# Altium PCB PCB1.PcbDoc
Units mil, origin at the board's own origin, x right, y up, seen from the top; angles counter-clockwise.
Board outline 4600 x 3500 mil, 2 copper layers (Top Layer, Bottom Layer); 17 components, 35 nets, 104 pads, 47 vias.
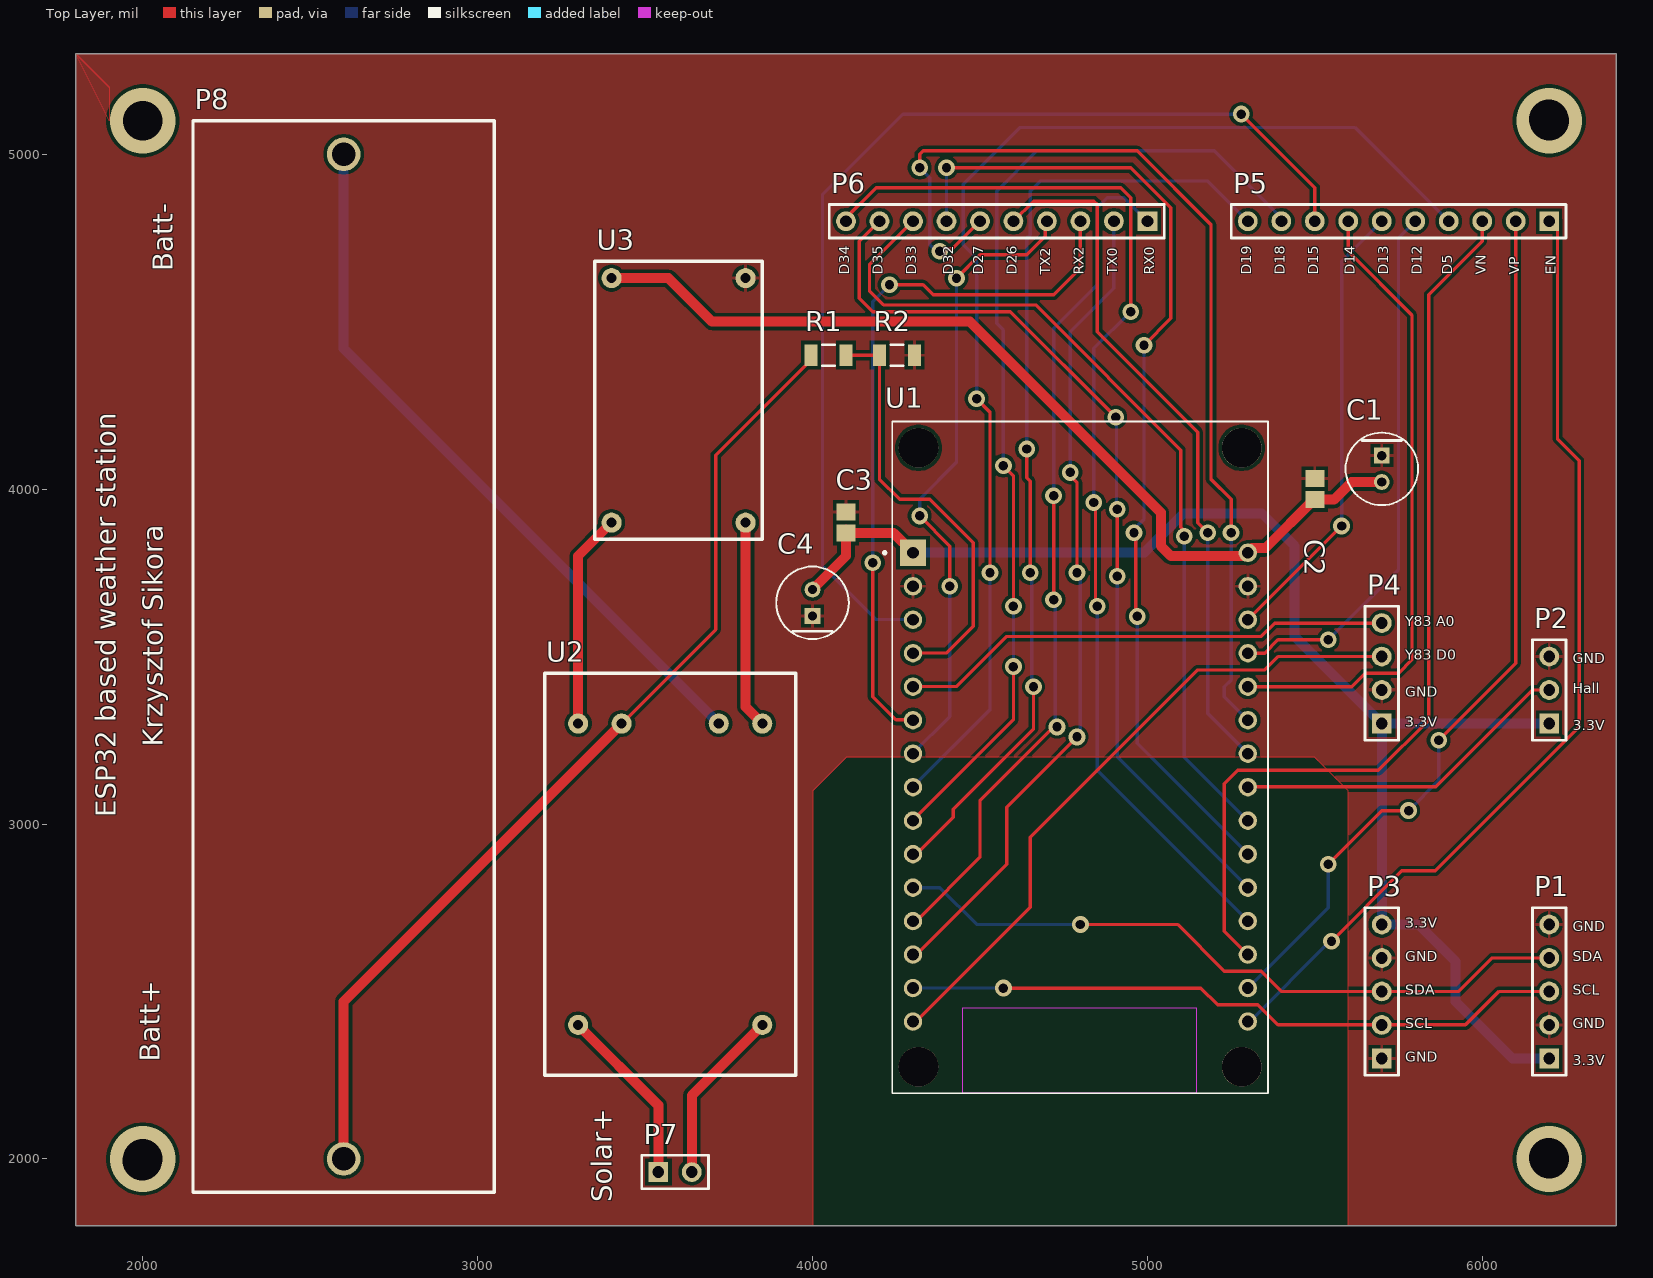
[diagram p0: Top Layer view]
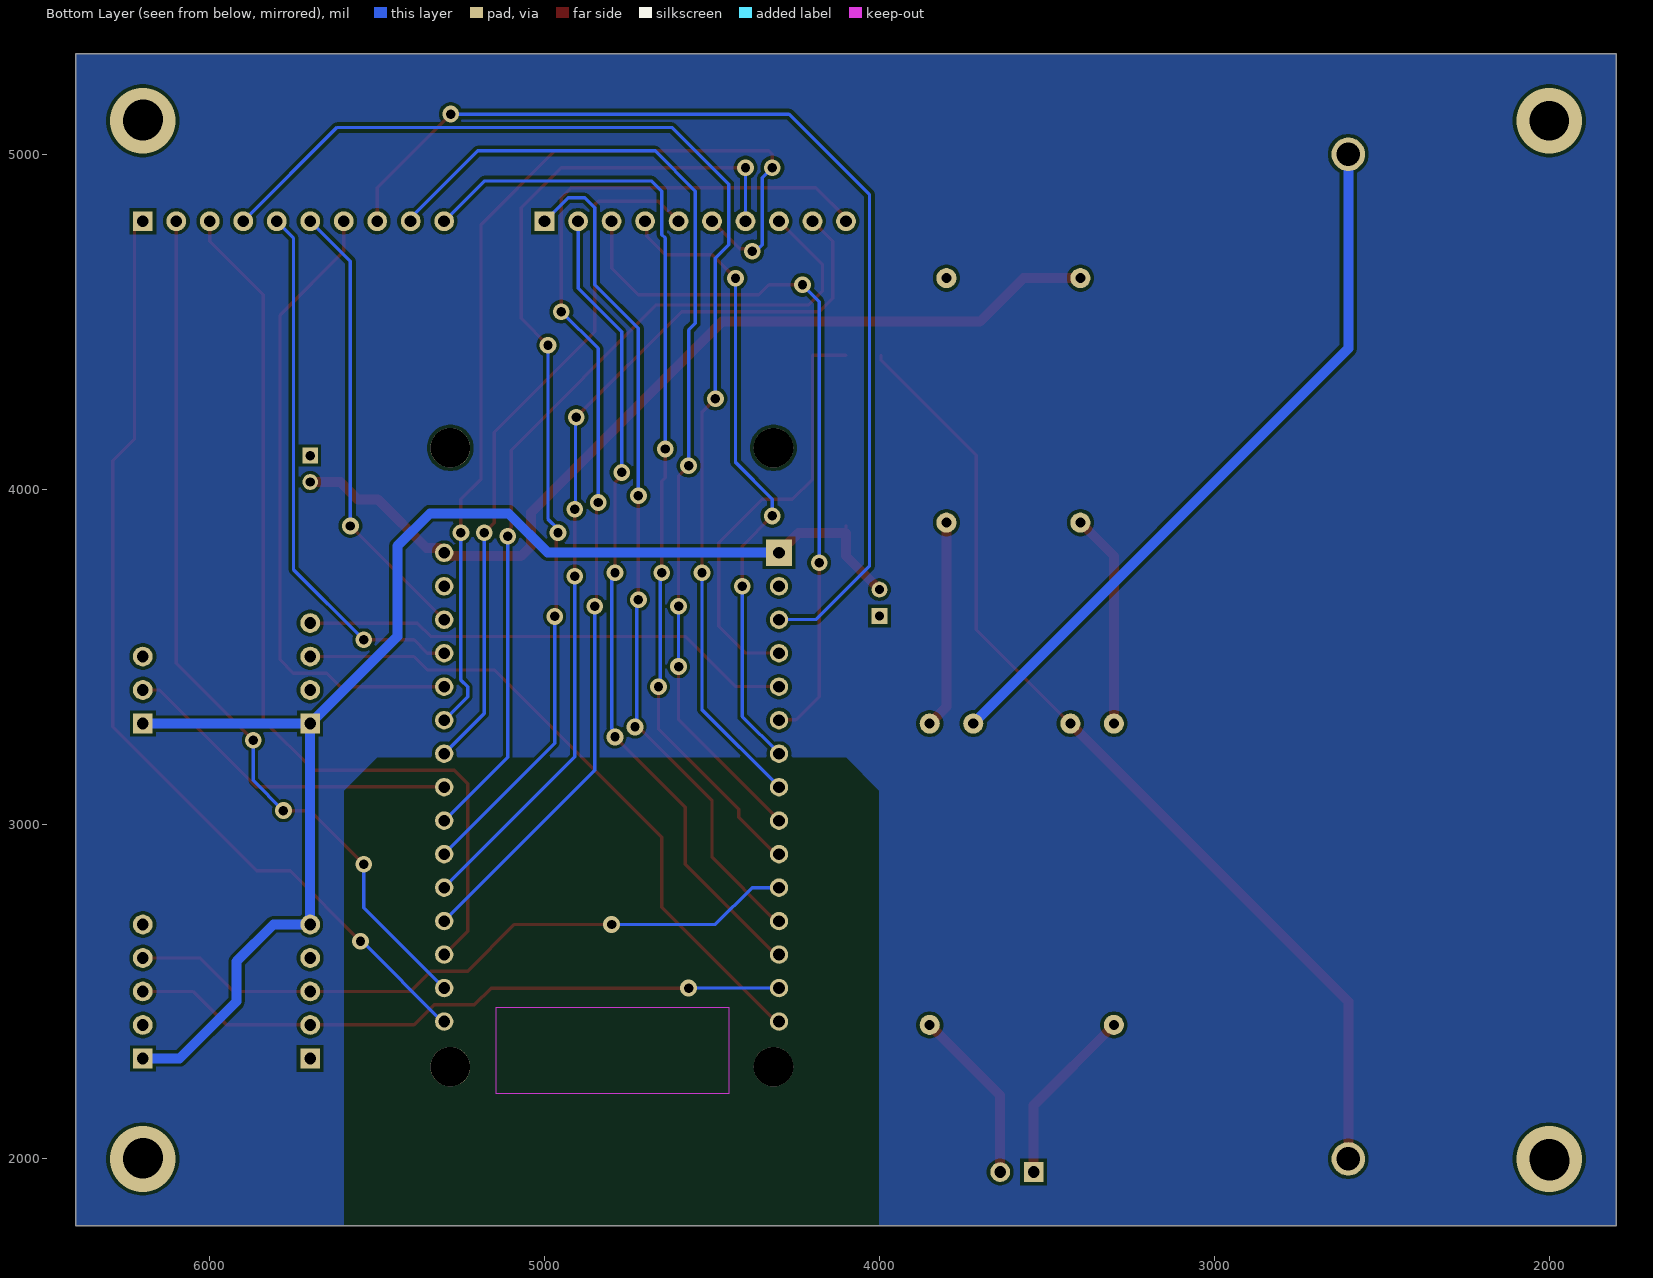
[diagram p1: Bottom Layer view, seen from below]

## Layer stack, top to bottom
Top Solder: solder mask 0.4, Solder Resist, Dk 3.5
Top Layer: signal copper 1.4
Dielectric 1: dielectric 12.6, FR-4, Dk 4.8
Bottom Layer: signal copper 1.4
Bottom Solder: solder mask 0.4, Solder Resist, Dk 3.5

## Board outline
1800,5300 6400,5300 6400,1800 1800,1800

## Design rules (kind name [scope] priority, off if disabled: settings)
Clearance [All] p1: gap=10 ignorepadtopadclearanceinfootprint=FALSE except(0: Arc-Hole Track-Hole SMDPad-Hole THPad-Hole Via-Hole Fill-Hole Poly-Hole Region-Hole Text-Hole)
PolygonConnect [All] p1: connectstyle=Relief reliefconductorwidth=10 reliefentries=4 polygonreliefangle="90 Angle" airgapwidth=10
RoutingVias [All] p1: holewidth=28 width=50 viastyle="Through Hole" minholewidth=28 minwidth=50 maxholewidth=28 maxwidth=50
SolderMaskExpansion [All] p1: expansion=4 istentingtop=FALSE
Width [All] p1: maxlimit=50 minlimit=5 preferedwidth=10 minimp=50.000000 maximp=50.000000 favimp=50.000000
30 further rules are at their usual default settings.

## Components (designator, comment, footprint, x,y, rotation, side; value= is the part's Value field where it differs from the comment)
C1 "10u" FP-RAD-TH-D_5_0_5-L_11_1-MFG 5700,4060.63 r270 top
C2 "100n" CAPC2013X140X50NL20T25 5500,4000 r270 top
C3 "100n" CAPC2013X140X50NL20T25 4100,3900 r270 top
C4 "10u" FP-RAD-TH-D_5_0_5-L_11_1-MFG 4000,3660.63 r90 top
P1 "Header 5" HDR1X5 6200,2300 r90 top
P2 "Header 3" HDR1X3 6200,3300 r90 top
P3 "Header 5" HDR1X5 5700,2300 r90 top
P4 "Header 4" HDR1X4 5700,3300 r90 top
P5 "Header 10" HDR1X10 6200,4800 r180 top
P6 "Header 10" HDR1X10 5000,4800 r180 top
P7 "Header 2" HDR1X2 3539.53,1960.47 r0 top
P8 "Header 2" "18650 holder" 3950,7150 r90 top
R1 "3.3k" FP-CRCW1206-e3-IPC_C 4047.79,4400 r180 top
R2 "10k" FP-CRCW1206-e3-IPC_C 4252.21,4400 r180 top
U1 "ESP32-DEVKIT-V1" MODULE_ESP32_DEVKIT_V1 4800,3199.17 r0 top
U2 "TP4056 charger" "TP4056 module" 3700,3000 r270 top
U3 "DC/DC converter" "DC/DC converter module" 3600,4200 r90 top

## Footprints (in the part's own frame and the unit in brackets; to place one, negate y for a bottom-side part, rotate by r counter-clockwise, add the part's x,y. Pads: shape width x height; smd on the part's side, far side on the other; paste and mask are expansions set on the pad)
"18650 holder" [mil]
  round 100 hole 70: 1(-5150,1350) 2(-2150,1350)
  silkscreen extent -5250,900 -2050,1800
CAPC2013X140X50NL20T25 [mm] "Chip Capacitor, 2-Leads, Body 2.00x1.25mm, IPC Medium Density"
  rect 1.3x1.45 smd: 1(-0.8,0) 2(0.8,0)
  body extent -1.1,-0.72 1.1,0.72, height 1.4
"DC/DC converter module" [mil]
  round 60 hole 30: 1(-300,200) 2(-300,-200) 3(430,200) 4(430,-200)
  silkscreen extent -350,-250 480,250
FP-CRCW1206-e3-IPC_C [mil]
  rect 37.64x65.28 smd paste+0 mask+0: 1(-52.21,0) 2(52.21,0)
  silkscreen extent -19,-31 19,31, body extent -75,-38 75,38, height 10
FP-RAD-TH-D_5_0_5-L_11_1-MFG [mm]
  rect 1.2x1.2 hole 0.7 paste-1000 mask+0: 1(-1,0)
  round 1.2 hole 0.7 paste-1000 mask+0: 2(1,0)
  silkscreen extent -2.75,-2.75 2.75,2.75, body extent -2.85,-2.85 2.85,2.85, height 0.25
HDR1X2 [mm] "Connector; Header; 2 Position"
  rect 1.5x1.5 hole 0.9: 1(0,0)
  round 1.5 hole 0.9: 2(2.54,0)
  silkscreen extent -1.27,-1.27 3.81,1.27
HDR1X3 [mm] "Connector; Header; 3 Position"
  rect 1.5x1.5 hole 0.9: 1(0,0)
  round 1.5 hole 0.9: 2(2.54,0) 3(5.08,0)
  silkscreen extent -1.27,-1.27 6.35,1.27
HDR1X4 [mm] "Connector; Header; 4 Position"
  rect 1.5x1.5 hole 0.9: 1(0,0)
  round 1.5 hole 0.9: 2(2.54,0) 3(5.08,0) 4(7.62,0)
  silkscreen extent -1.27,-1.27 8.89,1.27
HDR1X5 [mm] "Connector; Header; 5 Position"
  rect 1.5x1.5 hole 0.9: 1(0,0)
  round 1.5 hole 0.9: 2(2.54,0) 3(5.08,0) 4(7.62,0) 5(10.16,0)
  silkscreen extent -1.27,-1.27 11.43,1.27
HDR1X10 [mm] "Connector; Header; 10 Position"
  rect 1.5x1.5 hole 0.9: 1(0,0)
  round 1.5 hole 0.9: 2(2.54,0) 3(5.08,0) 4(7.62,0) 5(10.16,0) 6(12.7,0) 7(15.24,0) 8(17.78,0) 9(20.32,0) 10(22.86,0)
  silkscreen extent -1.27,-1.27 24.13,1.27
MODULE_ESP32_DEVKIT_V1 [mil]
  rect 78.74x78.74 / inner round 78.74 / far side rect 78.74x78.74 hole 35: 1(-500,610.83)
  round 55 hole 35: 2(-500,510.83) 3(-500,410.83) 4(-500,310.83) 5(-500,210.83) 6(-500,110.83) 7(-500,10.83) 8(-500,-89.17) 9(-500,-189.17) 10(-500,-289.17) 11(-500,-389.17) 12(-500,-489.17) 13(-500,-589.17) 14(-500,-689.17) 15(-500,-789.17) 16(500,-789.17) 17(500,-689.17) 18(500,-589.17) 19(500,-489.17) 20(500,-389.17) 21(500,-289.17) 22(500,-189.17) 23(500,-89.17) 24(500,10.83) 25(500,110.83) 26(500,210.83) 27(500,310.83) 28(500,410.83) 29(500,510.83) 30(500,610.83)
  round 118.11 hole 118.11 unplated: ""(-483.46,-924.21) ""(-483.46,924.21) ""(481.5,-924.21) ""(481.5,924.21)
  Keep-Out Layer region: 345.67,-1002.95 -350.79,-1002.95 -350.79,-747.44 345.67,-747.44
  Keep-Out Layer region: 345.67,-1002.95 -350.79,-1002.95 -350.79,-747.44 345.67,-747.44
  silkscreen extent -589,-1003 560,1003
"TP4056 module" [mil]
  round 60 hole 30: 1(600,-400) 2(600,150) 3(-300,-270) 4(-300,20) 5(-300,-400) 6(-300,150)
  silkscreen extent -450,-500 750,250

## Part data
C1 C4: library part CMP-05427-000247-1, "electrolytic tht 10uF", Capacitance=4.7uF, Case/Package=Radial, Max Operating Temperature=105°C, Min Operating Temperature=-55°C, Package Quantity=200, Ripple Current=26mA, Tolerance=20%, Voltage=50V, Construction=RADIAL, Diameter=5mm, Height=11mm, Height - Seated (Max)=0.492inch, Lead Diameter=0.5mm, Lead Free="Lead Free", Lead Pitch=2.5mm, Lead/Base Style=Straight, Length=11mm, Life (Hours)=1000Hour, Mount="Through Hole", Number of Pins=2, Packaging=Bulk, Polarity=Polar, REACH SVHC="No SVHC", Ripple Current (AC)=26mA, RoHS Compliant=Yes, Series=HD, Termination=Radial, Voltage Rating=50V, Voltage Rating (DC)=50V
C2 C3: library part CMP-2007-04629-1, "0805 ceramic", Manufacturer="AVX Interconnect / Elco", Part Number=08055C104K4Z2A
P1 P3: "Header, 5-Pin", LatestRevisionDate=17-Jul-2002, LatestRevisionNote="Re-released for DXP Platform.", Publisher="Altium Limited"
P2: "Header, 3-Pin", LatestRevisionDate=17-Jul-2002, LatestRevisionNote="Re-released for DXP Platform.", Publisher="Altium Limited"
P4: "Header, 4-Pin", LatestRevisionDate=17-Jul-2002, LatestRevisionNote="Re-released for DXP Platform.", Publisher="Altium Limited"
P5 P6: "Header, 10-Pin", LatestRevisionDate=17-Jul-2002, LatestRevisionNote="Re-released for DXP Platform.", Publisher="Altium Limited"
P7 P8: "Header, 2-Pin", LatestRevisionDate=17-Jul-2002, LatestRevisionNote="Re-released for DXP Platform.", Publisher="Altium Limited"
R1 R2: library part CMP-2003-04857-2, Case Code (Imperial)=1206, Case Code (Metric)=3216, Max Operating Temperature=155°C, Min Operating Temperature=-55°C, Package Quantity=5000, Power Rating=250mW, Resistance=0mR, Temperature Coefficient=100ppm/°C, Tolerance=1%, Voltage Rating=200V, Case/Package=1206, Composition="Thick Film", Contact Plating=Tin, Depth=1.6mm, Height=0.55mm, Lead Free="Lead Free", Length=3.2mm, Military Standard=Not, Mount="Surface Mount", Packaging="Tape and Reel", Radiation Hardening=No, Termination=SMD/SMT, Voltage Rating (DC)=200V, Weight=0.000353oz, Width=1.6mm
U1: "Dual core, Wi-Fi: 2.4 GHz up to 150 Mbits/s,BLE (Bluetooth Low Energy) and legacy Bluetooth, 32 bits, Up to 240 MHz", Package=None, Availability="Not in stock", Check_prices=https://www.snapeda.com/parts/ESP32-DEVKIT-V1/Do+it/view-part/?ref=eda, MF="Do it", MP=ESP32-DEVKIT-V1, Price=None, SnapEDA_Link=https://www.snapeda.com/parts/ESP32-DEVKIT-V1/Do+it/view-part/?ref=snap
U3: "SX1308 module"

## Free pads (board coordinates)
  round 60 hole 30: 13(6200,5100) 14(6200,2000) 15(2000,2000)
  round 157.48 hole 118.11: 16(1998.08,1993.98) 16(2000,5100) 16(6198.08,2003.98) 16(6198.08,5103.98)

## Via types
v1: diameter 50, hole 28, Top Layer to Bottom Layer, 43 vias
v2: diameter 196.85, hole 118.11, Top Layer to Bottom Layer, 4 vias

## Nets (pads, with @x,y where several pads share a name; then routed paths per layer and width w, separated by ;. In a path a pad name is that pad's centre, name@x,y a point inside that pad or via, vN(x,y) a via of type N, cw(c..) or ccw(c..) an arc to the next point about the centre after c; other vN are vias at no path point)
+3.3V: C3.2 C4.2 P1.1 P2.1 P3.5 P4.1 U1.1 | length 4158.7
  Top Layer w10: C3.2 C3.2@4100,3890.91
  Top Layer w30: C4.2 4100,3800 C3.2 4242.32,3868.5 U1.1@4300,3810.83
  Bottom Layer w30: U1.1@4300,3810.83 4990.83,3810.83 5107.57,3927.57 5342.43,3927.57 5440,3830 5440,3560 P4.1 ; P1.1 6090,2300 5920,2470 5920,2590 5810,2700 P3.5 P4.1 ; P2.1 P4.1
+5V: C1.2 C2.2 U1.30 U3.3 | length 2802.6
  Top Layer w10: U1.30@5289.17,3800 U1.30@5313.15,3823.98
  Top Layer w30: U3.3 3570,4630 3700,4500 4470,4500 5040,3930 5040,3830 5070,3800 U1.30@5289.17,3800 ; U1.30@5313.15,3823.98 5352.52,3823.98 5497.05,3968.5 5557.38,3968.5 5610.14,4021.26 C1.2
  Bottom Layer w10: U3.3@3398.96,4621.83 3400,4622.88 U3.3
ADDR_BH: C1.1 C2.1 C3.1 C4.1 P1.2 P1.5 P2.3 P3.1 P3.4 P4.2 R2.1 U1.2 U1.29 U3.4
BATT_SENS: R1.1 R2.2 U1.4 | length 1291.5
  Top Layer w10: R1.1 R2.2 4200,4030 4260,3970 4350,3970 4480,3840 4480,3590 4400.83,3510.83 U1.4@4300,3510.83
Battery+: P8.1 R1.2 U2.3 | length 2978.1
  Top Layer w10: U2.3 3710.67,3580.67 3710.67,4101.26 3995.58,4386.18 R1.2
  Top Layer w30: P8.1 2600,2470 U2.3
Battery-: P8.2 U2.4 | length 2163.9
  Bottom Layer w30: P8.2 2600,4420 U2.4
D5: P5.4 U1.8 | length 3564
  Top Layer w10: v1(4490,4270) 4530,4230 v1(4530,3750)
  Bottom Layer w10: U1.8@4300,3110.83 4530,3340.83 v1(4530,3750) ; v1(4490,4270) 4490,4690 4450,4730 4450,4910 4620,5080 5620,5080 P5.4
D12: P5.5 U1.27 | length 1614.3
  Top Layer w10: U1.27 5350,3510 5390,3550 v1(5540,3550)
  Bottom Layer w10: v1(5540,3550) 5750,3760 5750,4750 P5.5
D13: P5.6 U1.28 | length 1358.1
  Top Layer w10: U1.28 5570,3880 5574.14,3880 5580,3885.86 v1(5580,3890)
  Bottom Layer w10: v1(5580,3890) 5580,4680 P5.6
D14: P5.7 U1.26 | length 1911.8
  Top Layer w10: U1.26 5610,3410 5650,3450 5750,3450 5790,3490 5790,4520 5600,4710 P5.7
D15: P5.8 U1.3 | length 3206.5
  Top Layer w10: v1(5280,5120) 5500,4900 P5.8
  Bottom Layer w10: U1.3@4300,3610.83 4189.17,3610.83 4030,3770 4030,4880 4270,5120 v1(5280,5120)
D18: P5.9 U1.9 | length 3016.7
  Top Layer w10: U1.9@4300,3010.83 4600,3310.83 v1(4600,3470) ; v1(4570,4070) 4600,4040 v1(4600,3650)
  Bottom Layer w10: v1(4570,4070) 4570,4475.41 4550,4495.41 4550,4890 4670,5010 5200,5010 5400,4810 P5.9 ; v1(4600,3470) v1(4600,3650)
D19: P5.10 U1.10 | length 2859.2
  Top Layer w10: U1.10@4300,2910.83 4310.83,2910.83 4420,3020 4420,3044.59 4660,3284.59 v1(4660,3410) ; v1(4640,4120) 4640,4034.14 4650,4024.14 v1(4650,3750)
  Bottom Layer w10: v1(4640,4120) 4640,4750 4650,4760 4650,4890 4680,4920 5180,4920 P5.10 ; v1(4650,3750) 4655,3745 4655,3415 v1(4660,3410)
D26: P6.5 U1.24 | length 2111.2
  Top Layer w10: P6.5 4660,4860 4840,4860 4850,4850 4850,4470.41 5150,4170.41 5150,3900 v1(5180,3870)
  Bottom Layer w10: v1(5180,3870) 5180,3330 5290,3220 5300,3220 U1.24
D27: P6.6 U1.25 | length 2985.4
  Top Layer w10: v1(4320,4960) 4320,5000 4330,5010 4970,5010 5190,4790 5190,4030 5250,3970 v1(5250,3870) ; v1(4380,4710) 4387.65,4717.65 4417.65,4717.65 P6.6
  Bottom Layer w10: v1(4320,4960) 4350,4930 4350,4730 4370,4710 v1(4380,4710) ; v1(5250,3870) 5250,3430 5230,3410 5230,3380 U1.25
D32: P6.7 U1.21 | length 2995.3
  Top Layer w10: v1(4400,4960) 4950,4960 5070,4840 5070,4510 v1(4990,4430) ; v1(4960,3870) 4965,3865 4965,3625 v1(4970,3620)
  Bottom Layer w10: P6.7 v1(4400,4960) ; v1(4960,3870) 4960,3880.82 4990,3910.82 v1(4990,4430) ; v1(4970,3620) 4970,3240.83 U1.21@5300,2910.83
D33: P6.8 U1.22 | length 2578.3
  Top Layer w10: P6.8 4170,4670 4170,4591.8 4211.8,4550 4666.57,4550 5100,4116.57 5100,3885.5 5102.7,3882.8 5102.7,3867.3 v1(5110.36,3859.64)
  Bottom Layer w10: v1(5110.36,3859.64) 5110.36,3199.64 U1.22
D34: P6.10 U1.19 | length 3305.5
  Top Layer w10: P6.10 4100,4810 4190,4900 4920,4900 4950,4870 v1(4950,4530) ; v1(4840,3960) 4845,3955 4845,3655 v1(4850,3650)
  Bottom Layer w10: v1(4840,3960) 4840,4420 v1(4950,4530) ; v1(4850,3650) 4850,3160 5299.17,2710.83 U1.19@5300,2710.83
D35: P6.9 U1.20 | length 2734.4
  Top Layer w10: P6.9 4140,4740 4140,4570 4180,4530 4590.39,4530 v1@4905,4215.39 ; v1(4910,3740) v1(4910,3940)
  Bottom Layer w10: v1(4905.39,4215) 4907.7,4212.7 4907.7,3942.3 v1(4910,3940) ; v1(4910,3740) 4910,3200.83 U1.20@5300,2810.83
EN: P5.1 U1.16 | length 2941.8
  Top Layer w10: v1(5550,2650) 5760,2860 5860,2860 6290,3290 6290,4085 6224.53,4150.47 6224.53,4805.47 6210,4820 6200,4810 P5.1
  Bottom Layer w10: U1.16 5305,2410 5545,2650 v1(5550,2650)
Hall_out: P2.2 U1.23 | length 1019.8
  Top Layer w10: U1.23@5300,3110.83 5860.83,3110.83 6150,3400 P2.2
NetU2_5: U2.5 U3.1 | length 641.4
  Top Layer w30: U2.5 3300,3800 U3.1
NetU2_6: U2.6 U3.2 | length 620.7
  Top Layer w30: U3.2 3800,3350 U2.6
RX0: P6.1 U1.12 | length 2568.9
  Top Layer w10: U1.12@4300,2710.83 4310.83,2710.83 4500,2900 4500,3070 4720,3290 v1(4730,3290) ; v1(4720,3670) v1(4720,3980)
  Bottom Layer w10: v1(4720,3670) 4725,3665 4725,3295 v1(4730,3290) ; v1(4720,3980) 4720,4480 4850,4610 4850,4840 4880,4870 4930,4870 P6.1
RX2: P6.3 U1.6 | length 2154.9
  Top Layer w10: v1(4180,3780) 4180,3380 4249.17,3310.83 U1.6@4300,3310.83 ; v1(4230,4610) 4330,4610 4360,4580 4720,4580 4800,4660 P6.3
  Bottom Layer w10: v1(4180,3780) 4180,4560 v1(4230,4610)
SCL: P1.3 P3.2 U1.14 | length 1987.3
  Top Layer w10: v1(4570,2510) 5160,2510 5210,2460 5330,2460 5390,2400 P3.2 5950,2400 6050,2500 P1.3
  Bottom Layer w10: U1.14@4300,2510.83 4300.41,2510.41 4569.59,2510.41 v1(4570,2510)
SDA: P1.4 P3.3 U1.11 | length 2084.3
  Top Layer w10: v1(4800,2700) 5090,2700 5230,2560 5340,2560 5400,2500 5404.14,2500 P3.3 5930,2500 6030,2600 P1.4
  Bottom Layer w10: U1.11@4300,2810.83 4300.83,2810 4380,2810 4490,2700 v1(4800,2700) ; P1.4@6190,2590 P1.4
Solar+: P7.1 U2.1 | length 538.7
  Top Layer w30: U2.1 3539.53,2160.47 P7.1
Solar-: P7.2 U2.2 | length 526.7
  Top Layer w30: P7.2 3639.53,2189.53 U2.2
TX0: P6.2 U1.13 | length 2468.9
  Top Layer w10: U1.13@4300,2610.83 4310.83,2610.83 4580,2880 4580,3050 v1(4790,3260) ; v1(4770,4050) 4770,4039.18 4790,4019.18 v1(4790,3750)
  Bottom Layer w10: v1(4770,4050) 4770,4470 4900,4600 P6.2 ; v1(4790,3260) 4797.65,3267.65 4797.65,3283.51 4800,3285.86 4800,3729.18 4790,3739.18 v1(4790,3750)
TX2: P6.4 U1.7 | length 1911.4
  Top Layer w10: v1(4320,3920) 4410,3830 v1(4410,3710) ; v1(4430,4630) 4500,4700 4640,4700 4695.47,4755.47 4695.47,4795.47 P6.4
  Bottom Layer w10: U1.7@4300,3210.83 4410,3320.83 v1(4410,3710) ; v1(4320,3920) 4320,3970 4430,4080 v1(4430,4630)
VN: P5.3 U1.18 | length 2784
  Top Layer w10: U1.18 5230,2680 5230,3120 5270,3160 5690,3160 5840,3310 5840,4580 6000,4740 P5.3
VP: P5.2 U1.17 | length 2668.2
  Top Layer w10: v1(5540,2880) 5700,3040 v1(5780,3040) ; v1(5870,3250) 6100,3480 P5.2
  Bottom Layer w10: U1.17 5540,2750 v1(5540,2880) ; v1(5780,3040) 5870,3130 v1(5870,3250)
YL-83_A0: P4.4 U1.5 | length 1478.4
  Top Layer w10: U1.5@4300,3410.83 4430.83,3410.83 4580,3560 5340,3560 5380,3600 P4.4
YL-83_D0: P4.3 U1.15 | length 1973.6
  Top Layer w10: U1.15@4300,2410.83 4309.94,2410.83 4650,2750.89 4650,2960 5150,3460 5350,3460 5390,3500 P4.3
pads on no net: U1.
copper on no net:
  other v2: 2000,2000 6200,2000 2000,5100 6200,5100

## Polygon pours and split planes (outlines as drawn)
no net on Top Layer "NONET_L01_P001" (solid, pour order 1): 1800,5300 6400,5300 6400,1800 5600,1800 5600,3100 5500,3200 4100,3200 4000,3100 4000,1800 1800,1800 1800,5300 1900,5200 1900,5100
ADDR_BH on Top Layer "ADDR_BH_L01_P000" (solid, pour order 0): 6400,5300 6400,1800 5600,1800 5600,3100 5500,3200 4100,3200 4000,3100 4000,1800 1800,1800 1800,5300
no net on Bottom Layer "NONET_L02_P003" (solid, pour order 3): 1800,5300 6400,5300 6400,1800 5600,1800 5600,3100 5500,3200 4100,3200 4000,3100 4000,1800 1800,1800

## Silkscreen, mask and mechanical layers (free items; w line width, h text height)
Top Overlay:
  text "Batt-" at 2090,4650 h60 r90
  text "D34" at 4110,4640 h30 r90
  text "D35" at 4210,4640 h30 r90
  text "D33" at 4310,4640 h30 r90
  text "D32" at 4420,4640 h30 r90
  text "D27" at 4510,4640 h30 r90
  text "D26" at 4610,4640 h30 r90
  text "TX2" at 4710,4640 h30 r90
  text "RX2" at 4810,4640 h30 r90
  text "TX0" at 4910,4640 h30 r90
  text "RX0" at 5020,4640 h30 r90
  text "D19" at 5310,4640 h30 r90
  text "D18" at 5410,4640 h30 r90
  text "D15" at 5510,4640 h30 r90
  text "D14" at 5620,4640 h30 r90
  text "D13" at 5720,4640 h30 r90
  text "D12" at 5820,4640 h30 r90
  text "D5" at 5910,4640 h30 r90
  text "VN" at 6010,4640 h30 r90
  text "VP" at 6110,4640 h30 r90
  text "EN" at 6220,4640 h30 r90
  text "Y83 A0" at 5770,3590 h30
  text "Y83 D0" at 5770,3490 h30
  text "GND" at 6270,3480 h30
  text "Hall" at 6270,3390 h30
  text "GND" at 5770,3380 h30
  text "3.3V" at 5770,3290 h30
  text "3.3V" at 6270,3280 h30
  text "Krzysztof Sikora" at 2060.01,3230 h60 r90
  text "ESP32 based weather station" at 1920,3020 h60 r90
  text "3.3V" at 5770,2690 h30
  text "GND" at 6270,2680 h30
  text "GND" at 5770,2590 h30
  text "SDA" at 6270,2590 h30
  text "SDA" at 5770,2490 h30
  text "SCL" at 6270,2490 h30
  text "SCL" at 5770,2390 h30
  text "GND" at 6270,2390 h30
  text "Batt+" at 2050,2290 h60 r90
  text "GND" at 5770,2290 h30
  text "3.3V" at 6270,2280 h30
  text "Solar+" at 3400,1870 h60 r90